# Altium PCB GP2Y_v3_eth.PcbDoc
Units mm, origin at the board's own origin, x right, y up, seen from the top; angles counter-clockwise.
Board outline 52.5 x 69.3 mm, 4 copper layers (Top Layer, Layer 2, Layer 3, Bottom Layer), stack 1.369 mm thick; 102 components, 80 nets, 370 pads, 106 vias.
Unrouted connection lines stored in the file: 21.
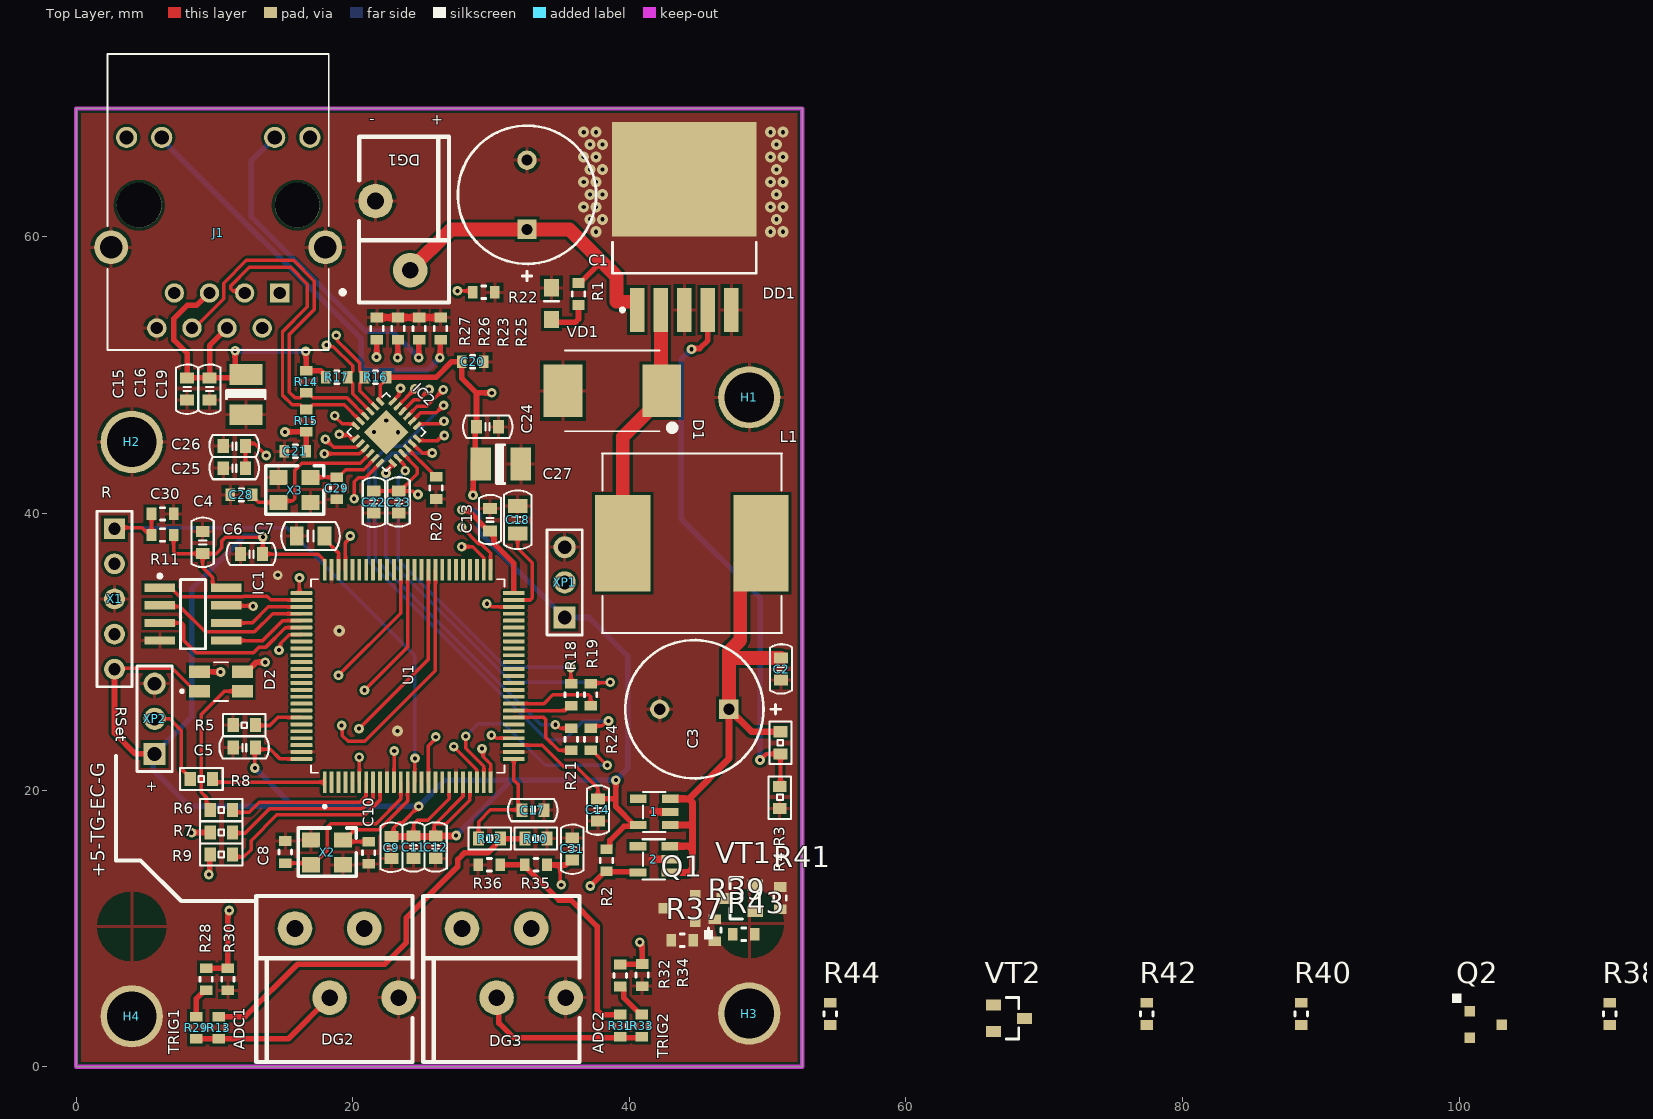
[diagram p0: Top Layer view]
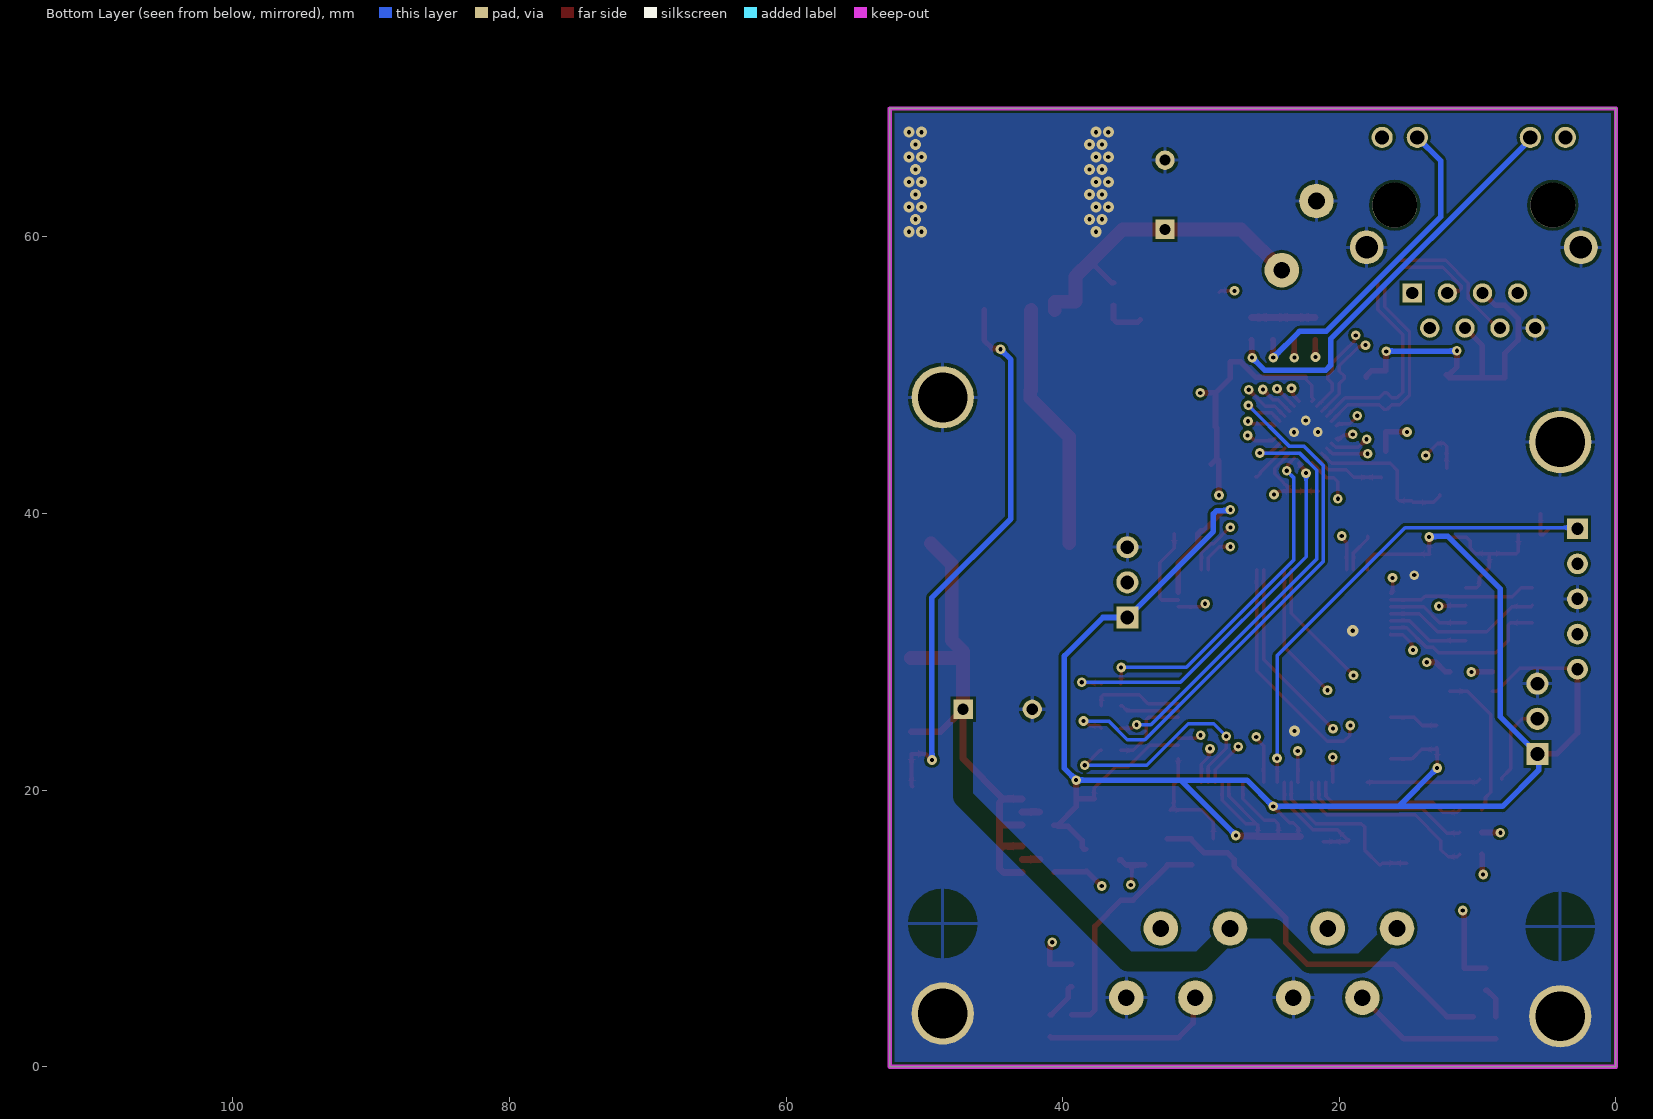
[diagram p1: Bottom Layer view, seen from below]
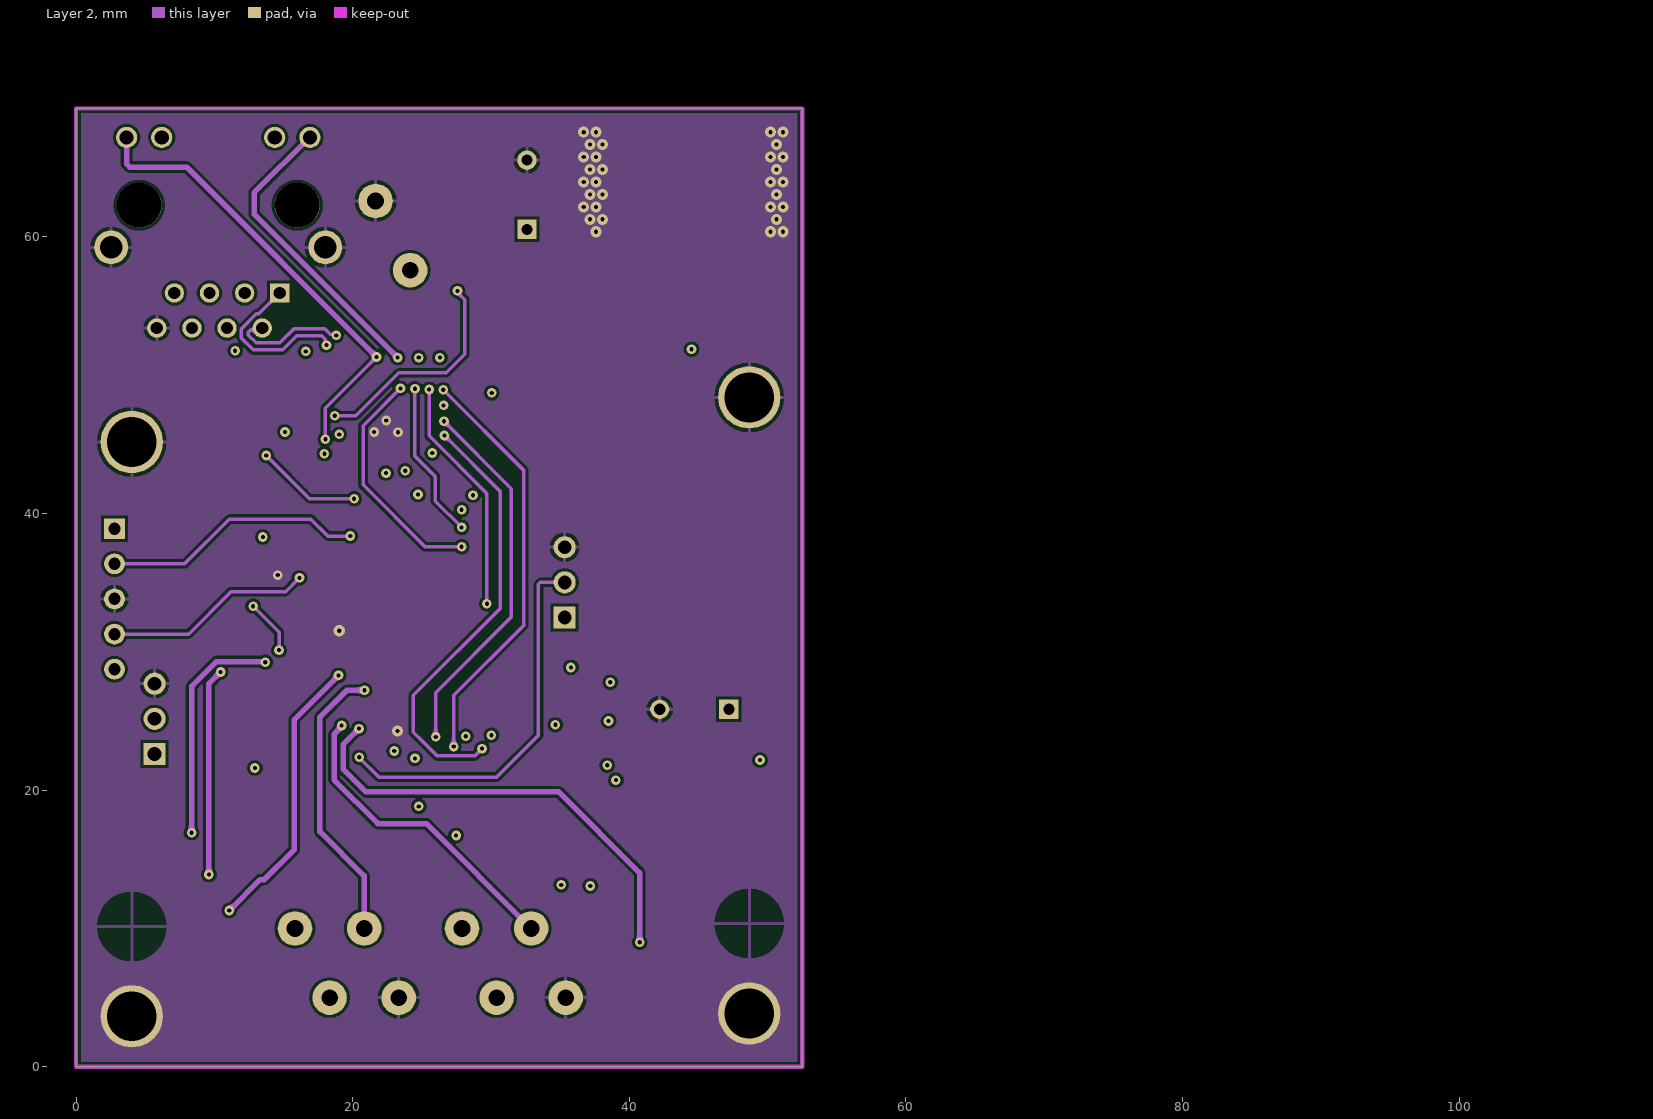
[diagram p2: Layer 2]
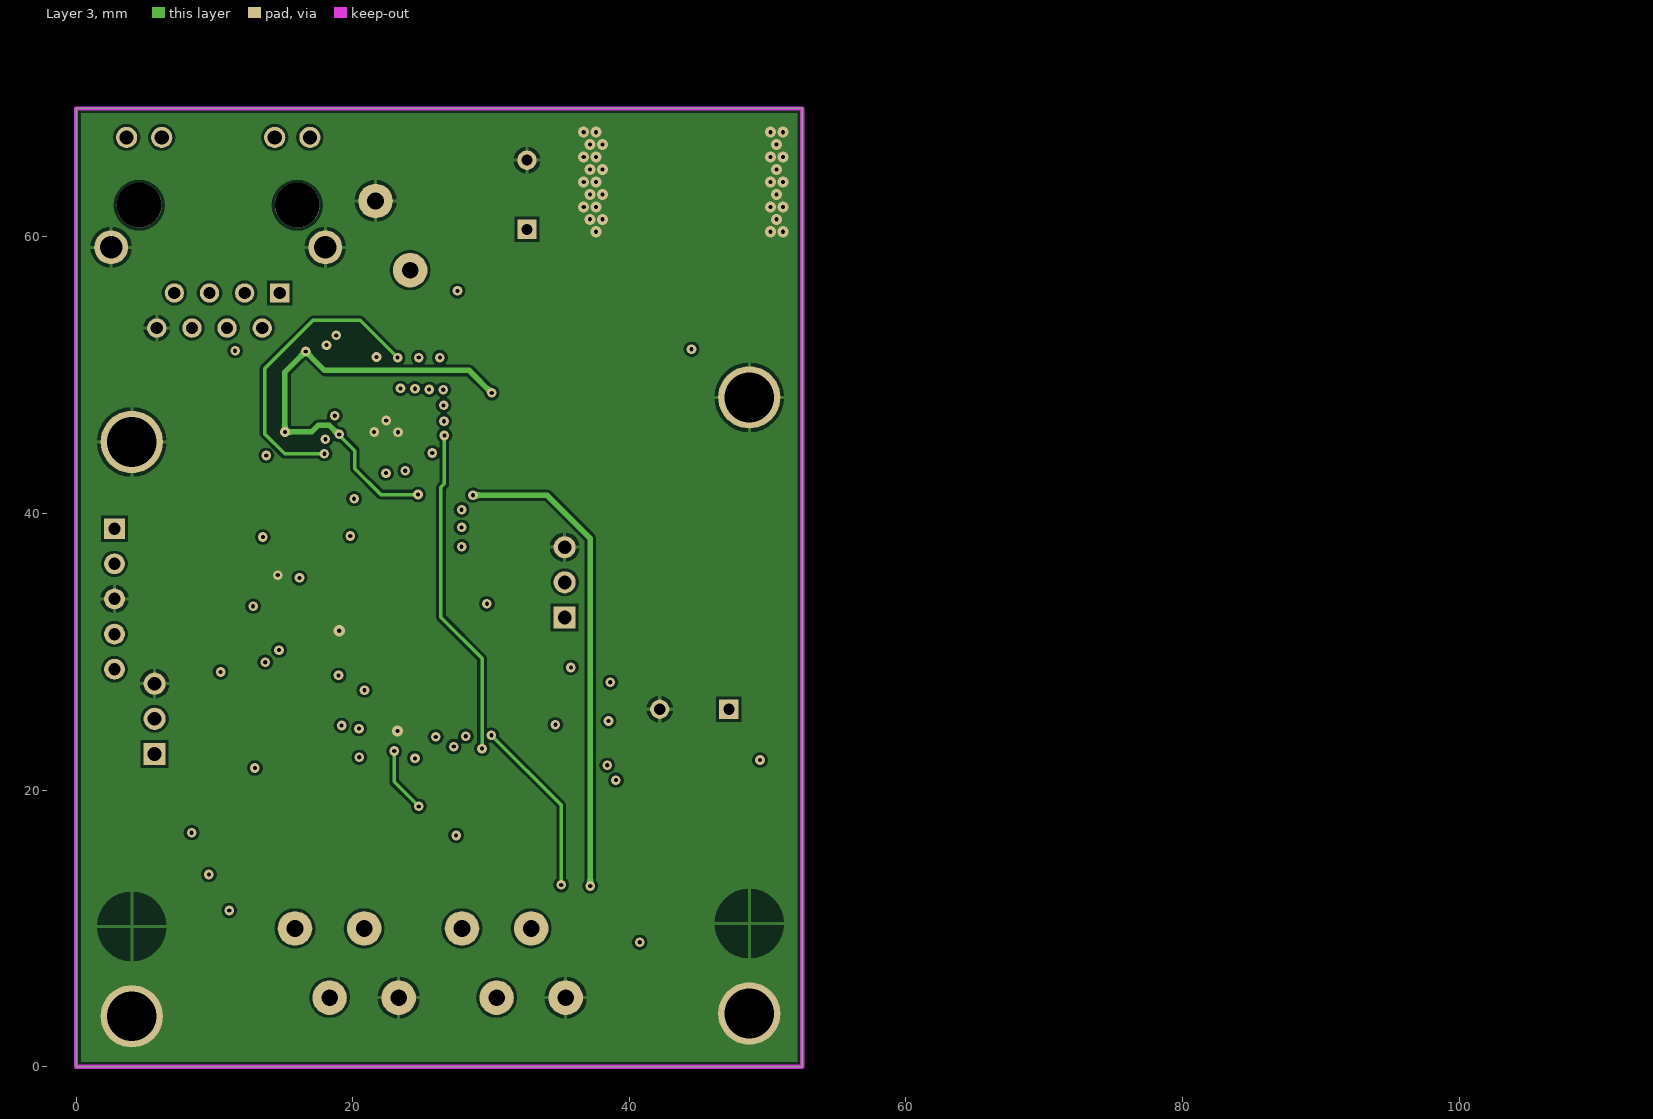
[diagram p3: Layer 3]

## Layer stack, top to bottom
Top Solder: solder mask 0.0254, SM-001, Dk 4
Top Layer: signal copper 0.035
Dielectric 1: prepreg 0.1295, PP-017, Dk 4.3
Dielectric 2: prepreg 0.1295, PP-017, Dk 4.3
Layer 2: signal copper 0.035
Dielectric 3: core 0.7112, Core-039, Dk 4.8
Layer 3: signal copper 0.035
Dielectric 4: prepreg 0.1295, PP-017, Dk 4.3
Dielectric 5: prepreg 0.1295, PP-017, Dk 4.3
Bottom Layer: signal copper 0.035
Bottom Solder: solder mask 0.0254, SM-001, Dk 4

## Board outline
0,0 0,69.3 52.5,69.3 52.5,0

## Design rules (kind name [scope] priority, off if disabled: settings)
Clearance Clearance_1 [InNetClass('ISO') vs InNet('GND')] p1: gap=1 ignorepadtopadclearanceinfootprint=FALSE
Clearance [All] p2: gap=0.2 ignorepadtopadclearanceinfootprint=FALSE
ComponentClearance [All] p1: gap=0.01 collisioncheckmode=3 verticalgap=0.01 showdistances=FALSE
DiffPairsRouting [All] p1: maxlimit=0.254 minlimit=0.2 mostfreqgap=0.254 toplayer_minwidth=0.25 toplayer_maxwidth=0.381 toplayer_prefwidth=0.381 midlayer1_minwidth=0.25 midlayer1_maxwidth=0.381 midlayer1_prefwidth=0.381 midlayer2_minwidth=0.25 midlayer2_maxwidth=0.381 midlayer2_prefwidth=0.381 bottomlayer_minwidth=0.25 bottomlayer_maxwidth=0.381 bottomlayer_prefwidth=0.381 maxuncoupledlength=12.7
HoleSize [All] p1: absolutevalues=TRUE maxlimit=5 minlimit=0.025 maxpercent=80.000 minpercent=20.000
MinimumSolderMaskSliver [All] p1: minsoldermaskwidth=0
PolygonConnect [All] p1: connectstyle=Relief reliefconductorwidth=0.254 reliefentries=4 polygonreliefangle="90 Angle" airgapwidth=0.254
RoutingVias [All] p1: holewidth=0.3 width=1 viastyle="Through Hole" minholewidth=0.3 minwidth=0 maxholewidth=1 maxwidth=4
SilkToSolderMaskClearance [IsPad] p1: minsilkscreentomaskgap=0.1 clearancetoexposedcopper=TRUE
SolderMaskExpansion [All] p1: expansion=0.102 istentingtop=FALSE
UnRoutedNet [All] p1: checkbadconnections=TRUE
Width [All] p1: maxlimit=4 minlimit=0.254 preferedwidth=0.254
24 further rules are at their usual default settings.

## Classes and differential pairs
differential pair P1_TX: +P1_TX_P -P1_TX_N
differential pair P1_RX: +P1_RX_P -P1_RX_N

## Components (designator, comment, footprint, x,y, rotation, side; value= is the part's Value field where it differs from the comment)
1 "ADP122AUJZ-3.3-R7" TSOT23-5L 41.8,18.425 r90 top
2 "ADP122AUJZ-3.3-R7" TSOT23-5L 41.775,15 r90 top
C1 "220uF 50v" "ECR 10x13mm" 32.6,63.05 r90 top value=220uF
C2 "0.1uF" "CAPACITOR 0603" 50.975,27.95 r90 top value="0603 0.1uF"
C3 "220uF 50v" "ECR 10x13mm" 44.7,25.85 r180 top value=220uF
C4 "0.1uF" "CAPACITOR 0603" 9.15,37.1 r90 top value="0603 0.1uF"
C5 "0.1uF" "CAPACITOR 0603" 12.96,23.08 r180 top value="0603 0.1uF"
C6 "0.1uF" "CAPACITOR 0603" 13.475,37.075 r180 top value="0603 0.1uF"
C7 "2.2uF" "CAPACITOR 0805" 17.95,38.375 r180 top value="0805 2.2uF"
C8 "0603 18 пФ" CAPCHIP0603 15.125,15.525 r270 top
C9 "0.1uF" "CAPACITOR 0603" 22.8,15.05 r90 top value="0603 0.1uF"
C10 "0603 18 пФ" CAPCHIP0603 21.15,15.475 r90 top
C11 "0.1uF" "CAPACITOR 0603" 24.4,15.075 r90 top value="0603 0.1uF"
C12 "0.001uF" "CAPACITOR 0603" 26,15.075 r90 top value="0603 0.1uF"
C13 "0.1uF" "CAPACITOR 0603" 29.93,38.75 r90 top value="0603 0.1uF"
C14 "0.1uF" "CAPACITOR 0603" 37.725,19.375 r270 top value="0603 0.1uF"
C15 "0.1uF" "CAPACITOR 0603" 8.025,49.812 r270 top value="0603 0.1uF"
C16 "0.1uF" "CAPACITOR 0603" 9.65,49.812 r270 top value="0603 0.1uF"
C17 "0.1uF" "CAPACITOR 0603" 33.825,18.55 r180 top value="0603 0.1uF"
C18 "2.2uF" "CAPACITOR 0805" 31.93,40.55 r270 top value="0805 2.2uF"
C19 "Cap T" "TECAP B" 12.275,48.6 r270 top value="TECAP B 10u 16V"
C20 "0603 0.1uF" CAPCHIP0603 28.675,50.975 r0 top
C21 "0603 0.1uF" CAPCHIP0603 15.85,44.5 r180 top
C22 "0.1uF" "CAPACITOR 0603" 21.525,41.625 r270 top value="0603 0.1uF"
C23 "0.1uF" "CAPACITOR 0603" 23.325,40.025 r90 top value="0603 0.1uF"
C24 "0.1uF" "CAPACITOR 0603" 28.95,46.275 r0 top value="0603 0.1uF"
C25 "0.1uF" "CAPACITOR 0603" 12.24,43.28 r180 top value="0603 0.1uF"
C26 "1uF" "CAPACITOR 0603" 12.24,44.88 r180 top value="0603 1uF"
C27 "TECAP B 10u 16V" "TECAP B" 30.7,43.575 r0 top
C28 "0603 18 пФ" CAPCHIP0603 11.95,41.35 r0 top
C29 "0603 18 пФ" CAPCHIP0603 18.85,41.825 r90 top
C30 "0603 0.1uF" CAPCHIP0603 6.25,39.975 r180 top
C31 "0.1uF" "CAPACITOR 0603" 35.875,16.55 r270 top value="0603 0.1uF"
D1 "MBRS540T3G" DIOM7958X213N 38.775,48.875 r180 top
D2 "150141M173100" LED_150141M173100 10.475,27.85 r180 top value=RGB
DD1 "LM2596S-ADJ" TO-263 43.975,60.725 r90 top
DG1 "прижимной контакт" dg250-2.5-2 26.95,67.25 r180 top
DG2 "прижимной контакт" dg250-2.5-4 13.025,0.35 r0 top
DG3 "прижимной контакт" dg250-2.5-4 25.1,0.35 r0 top
H1 "Hole" "Hole 3.5"#1 48.675,48.4 r0 top
H2 "Hole" "Hole 3.5"#1 4.025,45.175 r0 top
H3 "Hole" "Hole 3.5"#2 48.675,8.85 r0 top
H4 "Hole" "Hole 3.5"#3 4.025,15.15 r0 top
IC1 "GD25Q16CTIGR" NSO8 8.45,32.725 r0 top
IC2 "LAN8742A-CZ-TR" LAN8742A 22.435,44.112 r45 top
J1 "HR911105A" HANRUN_HR911105A 10.275,62.3 r0 top
L1 "SRR1208-6R5ML" SRR1208 44.525,37.85 r0 top
Q1 "IRLML6402" SOT23#1 44.775,10.5 r180 top
Q2 "IRLML6402" SOT23#1 100.784,4.001 r0 top
R1 "0603 10K" RESCHIP0603 36.325,55.875 r90 top
R2 "NC 0" RESCHIP0603 38.35,14.925 r270 top
R3 "0603 3K" "Resistor 0603" 50.925,22.625 r90 top
R4 "0603 1K" "Resistor 0603" 50.875,20.275 r270 top
R5 "510" "Resistor 0603" 12.96,24.705 r180 top value="0603 510R"
R6 "0603 3K" "Resistor 0603" 11.3,18.575 r180 top
R7 "0603 3K" "Resistor 0603" 11.3,16.95 r180 top
R8 "510" "Resistor 0603" 8.25,20.8 r0 top value="0603 510R"
R9 "0603 3K" "Resistor 0603" 11.3,15.35 r180 top
R10 "0603 10K" "Resistor 0603" 34.05,16.5 r180 top
R11 "0603 10K" RESCHIP0603 6.25,38.45 r180 top
R12 "0603 10K" "Resistor 0603" 29.1,16.5 r0 top
R13 "0603 0" RESCHIP0603 10.3,2.825 r270 top
R14 "0603 50R" RESCHIP0603 16.65,49.525 r90 top
R15 "0603 50R" RESCHIP0603 16.65,46.725 r270 top
R16 "0603 50R" RESCHIP0603 21.65,49.85 r0 top
R17 "0603 50R" RESCHIP0603 18.85,49.85 r180 top
R18 "0603 33R" RESCHIP0603 35.8,26.9 r90 top
R19 "0603 33R" RESCHIP0603 37.2,26.9 r90 top
R20 "0603 10K" RESCHIP0603 26.025,41.85 r90 top
R21 "0603 33R" RESCHIP0603 35.8,23.675 r90 top
R22 "0603 12.1k" RESCHIP0603 29.475,56 r0 top
R23 "0603 220 Ом" RESCHIP0603 24.8,53.375 r270 top
R24 "0603 33R" RESCHIP0603 37.2,23.675 r90 top
R25 "0603 220 Ом" RESCHIP0603 26.35,53.375 r270 top
R26 "0603 1.5K" RESCHIP0603 23.275,53.375 r270 top
R27 "0603 1.5K" RESCHIP0603 21.75,53.375 r270 top
R28 "0603 1K" RESCHIP0603 9.4,6.325 r270 top
R29 "0603 0" RESCHIP0603 8.7,2.825 r270 top
R30 "0603 2K" RESCHIP0603 10.975,6.325 r90 top
R31 "0603 0" RESCHIP0603 39.35,2.975 r270 top
R32 "0603 1K" RESCHIP0603 39.35,6.6 r270 top
R33 "0603 0" RESCHIP0603 40.9,2.975 r270 top
R34 "0603 2K" RESCHIP0603 40.925,6.625 r90 top
R35 "0603 10K" RESCHIP0603 29.875,14.6 r180 top
R36 "0603 10K" RESCHIP0603 33.25,14.6 r0 top
R37 "0603 3K" RESCHIP0603 43.825,9.15 r180 top
R38 "0603 3K" RESCHIP0603 110.884,3.826 r90 top
R39 "0603 200" RESCHIP0603 46.175,9.875 r270 top
R40 "0603 200" RESCHIP0603 88.583,3.826 r90 top
R41 "0603 1.5K" RESCHIP0603 50.9,12.2 r270 top
R42 "0603 1.5K" RESCHIP0603 77.407,3.826 r90 top
R43 "0603 10K" RESCHIP0603 48.275,9.575 r0 top
R44 "0603 10K" RESCHIP0603 54.531,3.826 r90 top
U1 "STM32F303V" QFP50P1600X1600X160-100N 23.975,28.255 r90 top value=STM32F407VE
VD1 "one color" 0805- 34.375,54.025 r90 top value=0805
VT1 "MMBT4401LT1" SOT23#2 47.975,12.175 r180 top
VT2 "MMBT4401LT1" SOT23#2 67.457,3.501 r0 top
X1 "PLS-5" PLS-5-3D 2.775,38.905 r270 top
X2 "12Mhz" XTAL_3.2_2.5 19.3,16.4 r180 top
X3 "25Mhz" XTAL_3.2_2.5 16.95,42.6 r180 top
XP1 "Battery" ZL201-3 35.325,35.025 r90 top
XP2 "reset setings" ZL201-3 5.675,25.16 r90 top

## Footprints (in the part's own frame and the unit in brackets; to place one, negate y for a bottom-side part, rotate by r counter-clockwise, add the part's x,y. Pads: shape width x height; smd on the part's side, far side on the other; paste and mask are expansions set on the pad)
0805- [mm]
  rect 1.25x1.1 smd mask+0.06: A(0,0) K(2.3,0)
  silkscreen extent 1.33,-0.5 1.33,0.5, body extent 0.12,-0.62 2.14,0.63, height 1.1
"CAPACITOR 0603" [mm]
  rect 0.8x1 smd: 1(0,0) 2(1.6,0)
  silkscreen extent -0.97,-0.8 2.6,0.8, body extent -0.01,-0.38 1.64,0.42, height 0.81
"CAPACITOR 0805" [mm]
  rect 1x1.4 smd: 1(0,0) 2(2,0)
  silkscreen extent -1.12,-1 3.12,1, body extent 0.01,-0.6 2.01,0.6, height 1.26
CAPCHIP0603 [mm] "Chip Capacitor, 2-Leads, Body 1,6x0,8mm"
  rect 0.7x0.9 smd mask+0.06: 1(-0.8,0) 2(0.8,0)
  silkscreen extent -0.15,-0.45 0.15,0.45, body extent -0.8,-0.4 0.8,0.4, height 0.9
dg250-2.5-2 [mm]
  round 2.5 hole 1.2: 1(2.8,9.65) 2(5.3,4.65)
  silkscreen extent 0,0 6.5,12
dg250-2.5-4 [mm]
  round 2.5 hole 1.2: 1(2.8,9.65) 2(5.3,4.65) 3(7.8,9.65) 4(10.3,4.65)
  silkscreen extent 0,0 11.3,12
DIOM7958X213N [mil]
  rect 110x150 smd: A(140.49,0) C(-140.49,0)
  silkscreen extent -176,-115 135,115
"ECR 10x13mm" [mm] "Rad Capacitor 50В-220мкФ"
  rect 1.4x1.4 hole 0.8 mask+0.06: 1(-2.5,0)
  round 1.4 hole 0.8 mask+0.06: 2(2.5,0)
  silkscreen extent -6.22,-5 5,5, body extent -5,-5 4.97,5, height 12.51
HANRUN_HR911105A [mm]
  rect 1.398x1.398 hole 0.89: 1(4.45,-6.35)
  round 1.398 hole 0.89: 2(3.18,-8.89) 3(1.91,-6.35) 4(0.64,-8.89) 5(-0.63,-6.35) 6(-1.9,-8.89) 7(-3.17,-6.35) 8(-4.44,-8.89)
  round 1.53 hole 1.02: 9(6.625,4.9) 10(4.085,4.9) 11(-4.085,4.9) 12(-6.625,4.9)
  round 2.445 hole 1.63: 15(7.745,-3.05) 16(-7.745,-3.05)
  round 3.25 hole 3.25 unplated: ""(-5.715,0) ""(5.715,0)
  silkscreen extent -8,-10.48 9.15,10.92
"Hole 3.5"#1 [mm]
  round 4.5 hole 3.6: 1(0,0)
"Hole 3.5"#2 [mm]
  round 4.5 hole 3.6: 1(0,-5)
"Hole 3.5"#3 [mm]
  round 4.5 hole 3.6: 1(0,-11.5)
LAN8742A [mm]
  rrect50% 0.69x0.28 smd mask+0.112: 1(-0.645,2.5) 2(-0.645,2) 3(-0.645,1.5) 4(-0.645,1) 5(-0.645,0.5) 6(-0.645,0) 13(3.145,0) 14(3.145,0.5) 15(3.145,1) 16(3.145,1.5) 17(3.145,2) 18(3.145,2.5)
  rrect50% 0.28x0.69 smd: 7(0,-0.645)
  rrect50% 0.28x0.69 smd mask+0.112: 8(0.5,-0.645) 9(1,-0.645) 10(1.5,-0.645) 11(2,-0.645) 12(2.5,-0.645) 19(2.5,3.145) 20(2,3.145) 21(1.5,3.145) 22(1,3.145) 23(0.5,3.145) 24(0,3.145)
  rect 2.286x2.286 smd: 25(1.25,1.25)
  silkscreen extent -0.75,-0.74 3.26,3.27, body extent -0.75,-0.74 3.26,3.27, height 1
LED_150141M173100 [mm]
  rect 1.5x0.9 smd: 1(1.55,0.7) 2(1.55,-0.7) 3(-1.55,0.7) 4(-1.55,-0.7)
  silkscreen extent -0.5,-1.4 2.92,1.4
NSO8 [mm] "SOIC, 8-Leads, Body 4.9x3.9mm, Pitch 1.27mm"
  rect 2.2x0.6 smd mask+0.06: 1(-2.4,1.905) 2(-2.4,0.635) 3(-2.4,-0.635) 4(-2.4,-1.905) 5(2.4,-1.905) 6(2.4,-0.635) 7(2.4,0.635) 8(2.4,1.905)
  silkscreen extent -2.52,-2.5 0.9,2.88, body extent -3,-2.45 3,2.45, height 1.7
PLS-5-3D [mm] "Connector; Header; 5 Position"
  rect 1.5x1.5 hole 0.9: 1(0,0)
  round 1.5 hole 0.9: 2(2.54,0) 3(5.08,0) 4(7.62,0) 5(10.16,0)
  silkscreen extent -1.27,-1.27 11.43,1.27, body extent -1.27,-1.27 11.43,1.27, height 8.44
QFP50P1600X1600X160-100N [mm]
  rrect25% 1.56x0.28 smd mask+0.112: 1(-7.68,6) 2(-7.68,5.5) 3(-7.68,5) 4(-7.68,4.5) 5(-7.68,4) 6(-7.68,3.5) 7(-7.68,3) 8(-7.68,2.5) 9(-7.68,2) 10(-7.68,1.5) 11(-7.68,1) 12(-7.68,0.5) 13(-7.68,0) 14(-7.68,-0.5) 15(-7.68,-1) 16(-7.68,-1.5) 17(-7.68,-2) 18(-7.68,-2.5) 19(-7.68,-3) 20(-7.68,-3.5) 21(-7.68,-4) 22(-7.68,-4.5) 23(-7.68,-5) 24(-7.68,-5.5) 25(-7.68,-6) 51(7.68,-6) 52(7.68,-5.5) 53(7.68,-5) 54(7.68,-4.5) 55(7.68,-4) 56(7.68,-3.5) 57(7.68,-3) 58(7.68,-2.5) 59(7.68,-2) 60(7.68,-1.5) 61(7.68,-1) 62(7.68,-0.5) 63(7.68,0) 64(7.68,0.5) 65(7.68,1) 66(7.68,1.5) 67(7.68,2) 68(7.68,2.5) 69(7.68,3) 70(7.68,3.5) 71(7.68,4) 72(7.68,4.5) 73(7.68,5) 74(7.68,5.5) 75(7.68,6)
  rrect25% 0.28x1.56 smd mask+0.112: 26(-6,-7.68) 27(-5.5,-7.68) 28(-5,-7.68) 29(-4.5,-7.68) 30(-4,-7.68) 31(-3.5,-7.68) 32(-3,-7.68) 33(-2.5,-7.68) 34(-2,-7.68) 35(-1.5,-7.68) 36(-1,-7.68) 37(-0.5,-7.68) 38(0,-7.68) 39(0.5,-7.68) 40(1,-7.68) 41(1.5,-7.68) 42(2,-7.68) 43(2.5,-7.68) 44(3,-7.68) 45(3.5,-7.68) 46(4,-7.68) 47(4.5,-7.68) 48(5,-7.68) 49(5.5,-7.68) 50(6,-7.68) 76(6,7.68) 77(5.5,7.68) 78(5,7.68) 79(4.5,7.68) 80(4,7.68) 81(3.5,7.68) 82(3,7.68) 83(2.5,7.68) 84(2,7.68) 85(1.5,7.68) 86(1,7.68) 87(0.5,7.68) 88(0,7.68) 89(-0.5,7.68) 90(-1,7.68) 91(-1.5,7.68) 92(-2,7.68) 93(-2.5,7.68) 94(-3,7.68) 95(-3.5,7.68) 96(-4,7.68) 97(-4.5,7.68) 98(-5,7.68) 99(-5.5,7.68) 100(-6,7.68)
  silkscreen extent -9.54,-7 7,7
RESCHIP0603 [mm] "Chip Resistor, 2-Leads, Body 1,6x0,8mm"
  rect 0.7x0.9 smd mask+0.06: 1(-0.8,0) 2(0.8,0)
  silkscreen extent -0.15,-0.45 0.15,0.45, body extent -0.8,-0.4 0.8,0.4, height 0.4
"Resistor 0603" [mm]
  rect 0.8x1 smd: 1(0,0) 2(1.6,0)
  silkscreen extent -0.72,-0.8 2.35,0.8, body extent -0.03,-0.45 1.63,0.45, height 0.46
SOT23#1 [mil]
  rect 30x30 smd: 1(0,0) 2(0,-75) 3(90,-37.5)
  silkscreen extent -50,25 -25,50, body extent -4,-97 94,21, height 41
SOT23#2 [mil] "SOT23, 3-Leads, Body 2.9x1.3mm, Pitch 0.95mm"
  rect 43.31x31.5 smd mask+2.36: 1(-44.29,37.4) 2(-44.29,-37.4) 3(44.29,0)
  silkscreen extent -8,-59 28,59, body extent -52,-59 52,59, height 43
SRR1208 [mm]
  rect 4x7 smd: P$1(-5,0) P$2(5,0)
  silkscreen extent -6.5,-6.5 6.5,6.5
"TECAP B" [mm] "Chip Capacitor, 2-Leads, Body 3,5x2,8mm"
  rect 1.5x2.4 smd mask+0.06: 1(-1.45,0) 2(1.45,0)
  silkscreen extent -0.3,-1.4 0.3,1.4, body extent -1.75,-1.4 1.75,1.4, height 1.92
TO-263 [mm] "D2-PAK, 6-Leads, Body 8.6x10.2mm, Pitch 1.7mm, Lead Span 14.1mm"
  rect 3.2x1.05 smd mask+0.06: 1(-6,3.4) 2(-6,1.7) 3(-6,0) 4(-6,-1.7) 5(-6,-3.4)
  rect 8.3x10.45 smd mask+0.06: 6(3.45,0)
  silkscreen extent -6.12,-5.2 -1.1,5.2, body extent -7.18,-5.08 7.46,5.08, height 4.57
TSOT23-5L [mm]
  rect 0.6x1.2 smd mask+0.07: 1(-0.95,-1.15) 2(0,-1.15) 3(0.95,-1.15) 4(0.95,1.15) 5(-0.95,1.15)
  silkscreen extent -1.45,-0.81 1.45,0.82, body extent -1.45,-1.4 1.45,1.4, height 1
XTAL_3.2_2.5 [mm]
  rect 1.3x1.1 smd: 1(0,0) 2(2.3,0) 3(2.3,1.8) 4(0,1.8)
  silkscreen extent -0.94,-0.86 3.25,2.64, body extent -0.46,-0.34 2.74,2.16, height 0.82
ZL201-3 [mm] "Connector; PLS-3; pitch 2.54"
  rect 1.6x1.6 hole 1 mask+0.06: 1(-2.54,0)
  round 1.6 hole 1 mask+0.06: 2(0,0) 3(2.54,0)
  silkscreen extent -3.81,-1.27 3.81,1.27, body extent -3.81,-1.27 3.81,1.27, height 8.44

## Part data
1 2: "Linear Voltage Regulator IC 1 Output 300mA TSOT-5", Package="TSOT-5 Analog Devices", Availability=Unavailable, MF="Analog Devices", MP=ADP122AUJZ-3.3-R7, Price=None, SnapEDA_Link=https://www.snapeda.com/parts/ADP122AUJZ-3.3-R7/Analog%20Devices%20Inc./view-part/231148/?ref=snap
C1 C3: library part "Cap Pol", "Polarized Capacitor (Rad)", Voltage=50, Type=Type, URL=http://www.hitano.com.tw/PDF/ECR_081225.pdf
C2 C4 C5 C6 C7 C9 C11 C12 C13 C14 C15 C16 C17 C18 C22 C23 C24 C25 C26 C31: library part Capasitor
C8 C10 C20 C21 C28 C29 C30: library part "Cap C", "Керамическтй конденсатор SMD C0603", Type=0603
C19: "Solid Tantalum Surface Mount Capacitors", Voltage=6v, Type=Type
C27: library part "Cap T", "Solid Tantalum Surface Mount Capacitors", Voltage=16V, Type="TECAP B"
D1: "Diode Schottky 40V 5A Surface Mount SMC", Package="DO-214 ON Semiconductor", Availability=Unavailable, MF="ON Semiconductor", MP=MBRS540T3G, Price=None, SnapEDA_Link=https://www.snapeda.com/parts/MBRS540T3G/ON%20Semiconductor/view-part/78777/?ref=snap
D2: "Red, Green, Blue _RGB_ 625nm Red, 520nm Green, 470nm Blue LED Indication - Discrete 2V Red, 3.2V Green, 3.2V Blue 1411 _3528 Metric_", Package="1411 WÃ¼rth Elektronik", Availability=Unavailable, MF="Wurth Electronics", MP=150141M173100, Price=None, SnapEDA_Link=https://www.snapeda.com/parts/150141M173100/Wurth%20Electronics%20Inc./view-part/281733/?ref=snap
DD1: "SIMPLE SWITCHER® Power Converter 150 KHz 3A Step-Down Voltage Regulator, 5-pin TO-263", Manufacturer="National Semiconductor", ComponentLink1URL=http://www.national.com/ds/LM/LM2596.pdf, ComponentLink2URL=http://www.national.com/pf/LM/LM2596.html, ComponentLink3URL=http://www.national.com/packaging/folders/ts5b.html, CompType=Switcher, PartNumber=LM2596S-ADJ, Published=13.04.2012, Publisher="Reukov A.V."
DG1: library part dg250-2.5-2
DG2 DG3: library part dg250-2.5-4
IC1: library part W25Q128FVEIG, "128M-bit Serial Flash Memory with uniform 4KB sectors and Dual/Quad SPI and QPI"
J1: "HR911105A Ethernet Interface Arduino Platform Evaluation Expansion Board", Package=None, Availability=Unavailable, MF=DFRobot, MP=HR911105A, Price=None, SnapEDA_Link=https://www.snapeda.com/parts/HR911105A/DFRobot/view-part/214807/?ref=snap
L1: "6.5ÂµH Shielded Wirewound Inductor 6A 18mOhm Max Nonstandard", Package="Nonstandard Bourns", Availability=Unavailable, MF=Bourns, MP=SRR1208-6R5ML, Price=None, SnapEDA_Link=https://www.snapeda.com/parts/SRR1208-6R5ML/Bourns/view-part/353452/?ref=snap
Q1 Q2: library part P-ch_SOT23, "20V P-Channel Enhancement Mode MOSFET", ComponentLink1Description="Manufacturer Link", ComponentLink1URL=http://www.zetex.com/, ComponentLink2Description=Datasheet, ComponentLink2URL=www.zetex.com/3.0/pdf/ZXM61P02F.pdf, DatasheetVersion=Jul-99, PackageDescription="SOT-23; 3 Leads; Body 3.1 x 2.5 mm, inc. leads (LxW max), Alternate Lead Configuration", PackageReference=SOT23, PackageVersion=1996, Published=17-Dec-2003, Publisher="Altium Limited"
R1 R2 R11 R13 R14 R15 R16 R17 R18 R19 R20 R21 R22 R24 R26 R27 R28 R29 R30 R31 R32 R33 R34 R35 R36 R37 R38 R39 R40 R41 R42 R43 R44: library part Res, "Резистор", Power_W={Power_W}, Tolerance_Percent={Tolerance_Percent}, Body={Body}, Class="Электронные компоненты", Installation={Installation}, Ordering_Information={Ordering_Information}, Pins=2, SubClass=Резисторы
R3 R4 R5 R6 R7 R8 R9 R10 R12: library part Resistor
R23 R25: library part Res, "Резистор SMD R0603", Tolerance=%, PWR=Value, Type=0603
U1: "ARMÂ® CortexÂ®-M4 STM32F3 Microcontroller IC 32-Bit 72MHz 100-LQFP (14x14)", Package="LQFP-100 STMicroelectronics", Availability=Unavailable, MF=STMicroelectronics, MP=STM32F303V, Price=None
VD1: library part "LED SMD", Color={Color}, Body={Body}, Class="Электронные компоненты", Diameter_mm={Diameter_mm}, Installation={Installation}, Luminous_intensity_mcd={Luminous_intensity_mcd}, Ordering_Information={Ordering_Information}, Pins=2, Pitch_mm={Pitch_mm}, SubClass=Светодиоды
VT1 VT2: library part BC846, "NPN Bipolar Transistor", Published=17.04.2012, Publisher="Reukov A.V."
X1: "Header, 5-Pin", LatestRevisionDate=17-Jul-2002, LatestRevisionNote="Re-released for DXP Platform.", Publisher="Altium Limited"
X2 X3: library part "XTAL 2-pin"
XP1: library part "Select jump", Class="Электронные компоненты", Installation=DIP, Ordering_Information={Ordering_Information}, Pins=3, Pitch_mm={Pitch_mm}, SubClass=Разъемы, Type_of_connector={Type_of_connector}
XP2: library part "Select jump", "Ter120", Class="Электронные компоненты", Installation=DIP, Ordering_Information={Ordering_Information}, Pins=3, Pitch_mm={Pitch_mm}, SubClass=Разъемы, Type_of_connector={Type_of_connector}

## Via types
v1: diameter 0.7, hole 0.3, Top Layer to Bottom Layer, tented both sides, 73 vias
v2: diameter 0.8, hole 0.3, Top Layer to Bottom Layer, tented both sides, 33 vias

## Nets (pads, with @x,y where several pads share a name; then routed paths per layer and width w, separated by ;. In a path a pad name is that pad's centre, name@x,y a point inside that pad or via, vN(x,y) a via of type N, cw(c..) or ccw(c..) an arc to the next point about the centre after c; other vN are vias at no path point)
+3.3v: 1.5 C4.1 C5.1 C6.1 C9.2 C11.2 C12.2 C13.1 C14.1 D2.1 IC1.8 R2.1 R11.1 U1.11 U1.19 U1.21 U1.22 U1.28 U1.50 U1.75 U1.100 X1.5 XP1.1 XP2.1 | length 185.3
  Top Layer w0.254: X1.5 2.857,28.827 6.948,28.827 8.625,27.15 D2.1 ; R11.1 7.05,37.25 7.2,37.1 C4.1 ; IC1.8 10.05,34.63 9.877,34.803 9.877,35.373 9.15,36.1 C4.1 ; v1(12.925,21.6) 12.925,23.045 C5.1 13.09,22.95 14.05,22.95 14.745,22.255 U1.100 ; U1.75 17.962,35.948 17.962,36.588 17.675,36.875 17.475,37.075 C6.1 13.5,37.1 v1(13.5,38.303) 10.828,38.303 10.543,38.018 10.543,37.518 10.3,37.275 10.125,37.1 C4.1 ; C9.2 22.813,16.663 22.957,16.807 22.957,17.282 23.325,17.65 23.6,17.65 v1(24.775,18.825) ; U1.11 22.988,20.587 22.988,22.813 v1(23,22.825) ; C11.2 24.4,17.55 24.675,17.825 25.425,17.825 26.975,19.375 U1.19 ; C12.2 25.881,16.794 25.881,17.456 26,17.575 ; U1.21 27.975,19.55 26,17.575 ; U1.22 28.475,19.275 26.775,17.575 26,17.575 ; U1.28 33.708,23.255 35.257,21.705 36.175,21.705 37.725,20.156 C14.1
  Top Layer w0.4: X1.5 2.775,24.12 4.275,22.62 XP2.1 ; v1(27.875,40.275) 27.932,40.218 28.362,40.218 29.83,38.75 C13.1 30.03,38.75 30.23,38.55 30.23,37.82 31.655,36.395 U1.50@31.655,34.315 ; C14.1 38.85,19.375 39.025,19.55 ; R2.1 38.45,15.725 38.6,15.875 38.6,16.375 39.6,17.375 1.5@40.35,17.375 ; v1(39.025,20.725) 39.025,19.55 ; 1.5 40.35,17.475 39.025,18.8 39.025,19.375 39.025,19.55
  Top Layer w0.5: C9.2@22.813,16.663 C12.2@25.987,16.663 ; C12.2 26.025,16.7 27.45,16.7 v1(27.475,16.725)
  Layer 3 w0.254: v1(23,22.825) 23,20.6 v1(24.775,18.825)
  Bottom Layer w0.4: v1(12.925,21.6) 15.7,18.825 ; v1(13.5,38.303) 13.453,38.35 12.15,38.35 8.35,34.55 8.35,25.295 XP2.1 5.575,22.52 5.575,21.45 8.2,18.825 15.7,18.825 ; v1(27.475,16.725) 31.475,20.725 ; v1(27.875,40.275) 27.932,40.218 28.866,40.218 29.1,39.983 29.1,38.71 XP1.1 37.09,32.485 39.875,29.7 39.875,21.575 v1(39.025,20.725) 31.475,20.725 ; 15.7,18.825 v1(24.775,18.825) 26.675,20.725 31.475,20.725
+3.3v_E: 2.5 C15.1 C16.1 C19.1 C20.1 C21.1 C22.1 C23.2 C24.1 C27.1 IC2.1 IC2.9 IC2.19 J1.4 J1.5 R2.2 R14.2 R15.2 R16.2 R17.2 | length 130.7
  Top Layer w0.254: v1(19.025,45.723) 19.049,45.723 19.11,45.662 19.712,45.662 20.071,45.303 20.09,45.303 IC2.1 ; C22.1 C23.2 C23.2@23.425,41.625 ; IC2.19 21.834,48.248 21.834,48.267 21.979,48.412 21.979,49.279 22.45,49.75 R16.2 ; IC2.9 24.675,43.286 24.675,42.875 C23.2@23.425,41.625 ; v1(24.725,41.375) 24.604,41.375 24.354,41.625 C23.2@23.425,41.625
  Top Layer w0.4: J1.5 9.599,55.95 8.703,55.055 8.029,55.055 7.075,54.1 7.075,52.55 8.025,51.6 C15.1 C16.1 ; J1.4 9.65,52.145 C16.1 ; v1(11.5,51.775) 11.5,50.6 12.05,50.05 C19.1 12.037,49.812 C16.1 ; v1(15.1,45.9) 15.112,45.912 16.638,45.912 R15.2 C21.1 ; v1(16.6,51.725) 16.625,51.7 16.625,50.35 R14.2 17.675,50.325 18.05,49.95 R17.2 ; R16.2 26.006,49.85 27.131,50.975 C20.1 27.875,49.8 28.95,48.725 ; v1(28.7,41.325) 28.7,43.825 28.85,43.975 C27.1@28.875,43.95 ; C27.1 C27.1@28.875,43.95 ; v1(30.05,48.725) 28.95,48.725 ; v1(37.175,13.075) 37.2,13.075 38.25,14.125 R2.2 38.387,14.088 40.587,14.088 2.5 ; C27.1@28.875,43.95 28.875,46.2 C24.1 28.95,48.725
  Layer 3 w0.254: v1(19.025,45.723) 19.025,45.675 20.15,44.55 20.15,43.25 22.025,41.375 v1(24.725,41.375)
  Layer 3 w0.4: v1(19.025,45.723) 18.968,45.723 18.316,46.375 17.5,46.375 17.025,45.9 v1(15.1,45.9) 15.1,50.225 v1(16.6,51.725) 17.975,50.35 28.425,50.35 v1(30.05,48.725) ; v1(28.7,41.325) 34.05,41.325 37.175,38.2 v1(37.175,13.075)
  Bottom Layer w0.4: v1(11.5,51.775) 11.525,51.75 16.575,51.75 v1(16.6,51.725)
+5v: 1.1 1.3 2.1 2.3 C2.2 C3.1 L1.P$2 Q1.3 Q2.3 R3.2 R37.2 R38.2 | length 40.7
  Top Layer w0.5: 2.1 44.275,14.05 44.568,14.343 44.568,15.657 ; 2.3 44.275,15.95 44.568,15.657 ; 1.1 44.475,17.475 44.568,17.382 ; 1.3 44.3,19.375 ; R3.2 48.825,24.225 C3.1 47.2,22.275 44.3,19.375 ; 44.3,19.375 44.568,19.107 44.568,17.382 ; 44.568,15.657 44.568,17.382
  Top Layer w1: C3.1 47.2,30.037 ; L1.P$2 48.025,36.35 48.025,30.863 47.2,30.037 ; C2.2 47.687,29.55 47.2,30.037
ADC1: R10.2 R12.2 R13.1 | length 28.9
  Top Layer w0.4: R13.1 12.225,3.625 16.025,7.425 22.325,7.425 23.875,8.975 23.875,10.775 27.6,14.5 27.6,15 28.075,15.475 29.775,15.475 30.7,16.4 R12.2 R10.2
ADC2: R31.1 R35.1 R36.1 | length 16.8
  Top Layer w0.4: R35.1 R36.1 32.45,14.5 34.9,12.05 35.775,12.05 37.675,10.15 37.675,4.1 38,3.775 R31.1
ECO1: DG2.3 U1.63 | length 30.6
  Top Layer w0.254: v1(20.85,27.225) 23.975,30.35 U1.63
  Layer 2 w0.4: DG2.3 20.825,13.8 17.625,17 17.625,25.275 19.575,27.225 v1(20.85,27.225)
ECO2: DG3.3 U1.59 | length 39.9
  Top Layer w0.254: v1(19.2,24.675) 19.256,24.619 19.256,23.944 19.67,23.53 20.88,23.53 25.975,28.625 U1.59
  Layer 2 w0.4: v1(19.2,24.675) 19.2,24.594 18.65,24.044 18.65,20.75 21.825,17.575 25.325,17.575 DG3.3
Eth_NRST: IC2.15 U1.23 | length 37
  Top Layer w0.254: IC2.15 24.669,47.761 25.361,47.761 v1(26.55,48.95) ; v1(27.3,23.15) 28.962,21.488 28.962,20.588 U1.23
  Layer 2 w0.254: v1(26.55,48.95) 32.35,43.15 32.35,31.9 27.3,26.85 v1(27.3,23.15)
GND: 1.2 2.2 C1.2 C2.1 C3.2 C4.2 C5.2 C6.2 C7.2 C8.1 C9.1 C10.1 C11.1 C12.1 C13.2 C14.2 C15.2 C16.2 C17.1 C18.1 C19.2 C20.2 C21.2 C22.2 C23.1 C24.2 C25.2 C26.2 C27.2 C28.1 C29.1 C30.1 C31.1 D1.A DD1.3 DD1.5 DD1.6 DG1.2 DG2.4 DG3.4 H1.1 H2.1 H3.1 H4.1 IC1.4 IC2.25 J1.8 J1.15 J1.16 R4.2 R5.2 R10.1 R20.1 R22.2 R23.1 R25.1 R26.1 R27.1 R30.1 R34.1 R35.2 R43.1 R44.1 U1.10 U1.20 U1.27 U1.74 U1.99 VD1.K VT1.2 VT2.2 X1.3 X2.2 X2.4 X3.2 X3.4 XP1.3 XP2.3 | length 7.1
  Top Layer w0.5: R27.1 R26.1 R23.1 R25.1 ; 41.65,15 2.2 ; 41.675,18.425 1.2
  other v1: 14.575,35.55 23.275,45.875 21.55,45.9 22.425,46.725
  other v2: 23.225,24.275 19.025,31.525 37.6,60.375 50.2,60.375 51.1,60.375 37.15,61.275 38.05,61.275 50.65,61.275 36.7,62.175 37.6,62.175 50.2,62.175 51.1,62.175 37.15,63.075 38.05,63.075 50.65,63.075 36.7,63.975 37.6,63.975 50.2,63.975 51.1,63.975 37.15,64.875 38.05,64.875 50.65,64.875 36.7,65.775 37.6,65.775 50.2,65.775 51.1,65.775 37.15,66.675 38.05,66.675 50.65,66.675 36.7,67.575 37.6,67.575 50.2,67.575 51.1,67.575
NetC7_1: C7.1 U1.73 | length 2.9
  Top Layer w0.254: C7.1 17.95,38.175 18.975,37.15 U1.73
NetC8_2: C8.2 U1.12 X2.3 | length 12.6
  Top Layer w0.254: C8.2 16.875,14.725 X2.3 17.1,14.6 18.175,15.675 18.175,17.35 18.4,17.575 21.691,17.575 23.475,19.359 U1.12
NetC10_2: C10.2 U1.13 X2.1 | length 9.1
  Top Layer w0.254: C10.2 19.425,16.275 X2.1 19.4,16.4 20.121,17.121 21.879,17.121 23.975,19.217 U1.13
NetC17_2: C17.2 R12.1 U1.26 | length 8.6
  Top Layer w0.254: R12.1 29.1,17.725 29.95,18.575 C17.2@32.2,18.575 ; U1.26 31.655,20.731 31.952,20.434 31.952,18.823 C17.2@32.2,18.575 ; C17.2 C17.2@32.2,18.575
NetC18_2: C18.2 U1.49 | length 6.5
  Top Layer w0.254: U1.49 31.66,33.75 32.826,33.75 32.975,33.899 32.975,36.45 31.93,37.495 C18.2
NetC25_1: C25.1 C26.1 IC2.6 | length 14.9
  Top Layer w0.254: C25.1 12.24,44.08 12.24,44.2 C26.1 12.438,45.078 12.872,45.078 v1(13.75,44.2) ; v1(20.1,41.075) 20.1,42.3 20.4,42.6 20.923,42.6 IC2.6
  Layer 2 w0.254: v1(13.75,44.2) 16.875,41.075 v1(20.1,41.075)
NetC28_2: C28.2 IC2.4 X3.3 | length 11.5
  Top Layer w0.254: C28.2 12.75,41.25 13.2,40.8 X3.3 14.769,40.919 15.651,40.919 15.8,41.068 15.8,43.112 16.313,43.625 20.533,43.625 IC2.4
NetC29_2: C29.2 IC2.5 X3.1 | length 5.3
  Top Layer w0.254: X3.1 16.975,42.625 18.95,42.625 19.496,43.171 20.787,43.171 IC2.5
NetC31_2: C31.2 R36.2 U1.29 | length 18.1
  Top Layer w0.254: v1(30.027,23.975) 30.148,23.975 30.368,23.755 U1.29 ; 35,14.6 35,13.225 v1(35.075,13.15)
  Top Layer w0.4: R36.2 35,14.6 35.425,14.6 35.775,14.95 C31.2
  Layer 3 w0.254: v1(30.027,23.975) 35.075,18.927 v1(35.075,13.15)
NetD1_C: D1.C DD1.2 L1.P$1 | length 18.1
  Top Layer w1: L1.P$1 39.525,45.549 42.343,48.367 D1.C 42.3,48.918 42.3,54.7 DD1.2
NetD2_2: D2.2 R9.2 | length 18
  Top Layer w0.4: D2.2 v1(10.45,28.55) ; v1(9.6,13.9) 9.65,13.95 9.65,15.3 R9.2
  Layer 2 w0.4: v1(9.6,13.9) 9.6,27.7 v1(10.45,28.55)
NetD2_3: D2.3 R6.2 | length 10.8
  Top Layer w0.254: R6.2 9.427,18.848 9.427,19.473 9.05,19.85 9.05,25.475 10.725,27.15 D2.3
NetD2_4: D2.4 R7.2 | length 20
  Top Layer w0.4: v1(8.35,16.925) 8.362,16.937 9.688,16.937 R7.2 ; D2.4 12.325,28.55 13.025,29.25 v1(13.675,29.25)
  Layer 2 w0.4: v1(8.35,16.925) 8.35,27.511 10.139,29.3 13.625,29.3 v1(13.675,29.25)
NetDD1_4: DD1.4 R3.1 R4.1 | length 40
  Top Layer w0.3: v1(49.45,22.175) 49.9,22.625 R3.1 50.925,20.325 R4.1
  Top Layer w0.4: v1(44.5,51.875) 44.557,51.932 45.082,51.932 45.675,52.525 DD1.4
  Bottom Layer w0.4: v1(44.5,51.875) 43.75,51.125 43.75,39.625 49.45,33.925 v1(49.45,22.175)
NetDG2_1: DG2.1 Q2.2
NetDG2_2: DG2.2 R13.2 R29.2 | length 10.9
  Top Layer w0.4: R29.2 R13.2 15.35,2.025 DG2.2
NetDG3_1: DG3.1 Q1.2
NetDG3_2: DG3.2 R31.2 R33.2 | length 12.7
  Top Layer w0.4: DG3.2 30.575,4.825 30.575,3.15 31.625,2.1 40.825,2.1 R33.2
NetIC1_1: IC1.1 U1.77 | length 10.6
  Top Layer w0.254: IC1.1 6.85,34.63 7.493,33.987 12.069,33.987 12.107,34.025 13.8,34.025 14.07,33.755 U1.77
NetIC1_2: IC1.2 U1.79 | length 11.6
  Top Layer w0.254: IC1.2 6.135,33.275 7.5,33.275 9.328,31.447 12.897,31.447 14.205,32.755 U1.79
NetIC1_3: IC1.3 U1.81 | length 12.6
  Top Layer w0.254: IC1.3 7.626,32.09 7.775,31.941 7.775,30.825 8.675,29.925 12.825,29.925 13.25,30.35 13.725,30.35 15.13,31.755 U1.81
NetIC1_5: IC1.5 U1.80 | length 6
  Top Layer w0.254: IC1.5 13.489,30.82 14.924,32.255 U1.80
NetIC1_6: IC1.6 U1.78 | length 5.9
  Top Layer w0.254: IC1.6 12.74,32.09 13.905,33.255 U1.78
NetIC1_7: IC1.7 U1.82 | length 8.2
  Top Layer w0.254: IC1.7 10.88,33.33 12.77,33.33 v1(12.8,33.3) ; v1(14.675,30.125) 14.76,30.21 14.76,30.582 15.42,31.242 16.282,31.242 U1.82
  Layer 2 w0.254: v1(12.8,33.3) 14.675,31.425 v1(14.675,30.125)
NetIC2_2: IC2.2 J1.12 R27.2 | length 37.4
  Top Layer w0.254: v1(18.025,45.375) 18.617,44.783 20.259,44.783 20.546,45.07 IC2.2
  Top Layer w0.4: v1(21.725,51.325) 21.737,51.337 21.737,52.563 R27.2
  Layer 2 w0.254: v1(18.025,45.375) 18.025,47.625 v1(21.725,51.325)
  Layer 2 w0.4: J1.12 3.65,65.284 3.884,65.05 8,65.05 v1(21.725,51.325)
NetIC2_3: IC2.3 J1.9 R26.2 | length 48.2
  Top Layer w0.254: v1(17.95,44.325) 20.508,44.325 20.899,44.717 IC2.3
  Top Layer w0.4: v1(23.25,51.275) 23.262,51.287 23.262,52.563 R26.2
  Layer 2 w0.4: J1.9 16.875,67.2 12.875,63.2 12.875,61.65 v1(23.25,51.275)
  Layer 3 w0.254: v1(17.95,44.325) 15.075,44.325 13.625,45.775 13.625,50.475 17.125,53.975 20.55,53.975 v1(23.25,51.275)
NetIC2_7: IC2.7 R19.2 | length 28.5
  Top Layer w0.254: v1(22.4,42.925) 22.4,43.045 22.942,43.587 22.942,43.605 IC2.7 ; R19.2 37.25,27.75 38.575,27.75 v1(38.625,27.8)
  Bottom Layer w0.254: v1(22.4,42.925) 22.4,36.883 31.483,27.8 v1(38.625,27.8)
NetIC2_8: IC2.8 R18.2 | length 24.7
  Top Layer w0.254: IC2.8 23.244,43.991 23.715,43.521 23.715,43.185 v1(23.8,43.1) ; v1(35.775,28.875) 35.775,27.725 R18.2
  Bottom Layer w0.254: v1(23.8,43.1) 23.275,42.575 23.275,36.65 31.05,28.875 v1(35.775,28.875)
NetIC2_10: IC2.10 R20.2 | length 3
  Top Layer w0.254: IC2.10 25.702,42.966 25.702,42.873 25.925,42.65 R20.2
NetIC2_11: IC2.11 R21.2 | length 32
  Top Layer w0.254: IC2.11 24.323,45.07 25.018,44.375 v1(25.75,44.375) ; v1(34.65,24.725) 34.755,24.725 35.005,24.475 R21.2
  Bottom Layer w0.254: v1(25.75,44.375) 22.875,44.375 21.629,43.129 21.629,36.713 33.617,24.725 v1(34.65,24.725)
NetIC2_14: IC2.14 R24.2 | length 41.6
  Top Layer w0.254: IC2.14 24.903,47.287 26.037,47.287 v1(26.575,47.825) ; R24.2 37.377,24.652 38.031,24.652 38.379,25 v1(38.5,25)
  Bottom Layer w0.254: v1(26.575,47.825) 23.6,44.85 22.525,44.85 21.175,43.5 21.175,36.525 34.05,23.65 35.325,23.65 36.675,25 v1(38.5,25)
NetIC2_24: IC2.24 R22.1 | length 19
  Top Layer w0.254: v1(18.702,47.077) 18.741,47.038 18.741,46.975 19.235,46.481 20.066,46.481 IC2.24 ; v1(27.575,56.1) 28.575,56.1 R22.1
  Layer 2 w0.254: v1(18.702,47.077) 20.226,47.076 23.325,50.175 26.75,50.175 28.1,51.525 28.1,55.454 27.575,55.979 v1(27.575,56.1)
NetJ1_10: J1.10 R23.2 | length 24.1
  Top Layer w0.4: v1(24.775,51.275) 24.788,51.287 24.788,52.563 R23.2
  Bottom Layer w0.4: J1.10 12.675,65.515 12.675,61.45 20.95,53.175 22.875,53.175 v1(24.775,51.275)
NetJ1_11: J1.11 R25.2 | length 30
  Top Layer w0.4: v1(26.3,51.275) 26.325,51.3 26.325,52.55 R25.2
  Bottom Layer w0.4: J1.11 6.19,67.06 20.625,52.625 20.625,50.725 20.975,50.375 25.4,50.375 v1(26.3,51.275)
NetQ1_1: Q1.1 R37.1 R39.2
NetQ2_1: Q2.1 R38.1 R40.2
NetR1_1: R1.1 VD1.A | length 3.1
  Top Layer w0.4: VD1.A 34.575,53.825 36.091,53.825 36.325,54.059 R1.1
NetR5_1: R5.1 U1.94 | length 3.6
  Top Layer w0.254: R5.1 12.99,24.675 14,24.675 14.58,25.255 U1.94
NetR6_1: R6.1 U1.7 | length 11.2
  Top Layer w0.254: R6.1 11.475,18.4 12.525,18.4 13.25,19.125 20.525,19.125 20.962,19.562 20.962,20.562 U1.7
NetR7_1: R7.1 U1.8 | length 12.4
  Top Layer w0.254: R7.1 11.35,16.9 12.225,16.9 13.996,18.671 20.713,18.671 21.475,19.433 U1.8
NetR8_1: R8.1 XP2.2 | length 6.1
  Top Layer w0.254: XP2.2 6.765,25.16 7.618,24.307 7.618,21.532 8.25,20.9 R8.1
NetR8_2: R8.2 U1.1 | length 8.2
  Top Layer w0.254: R8.2 10.075,20.575 U1.1
NetR9_1: R9.1 U1.9 | length 14.1
  Top Layer w0.254: R9.1 11.475,15.175 12.125,15.175 12.65,15.7 12.65,16.35 14.517,18.217 20.901,18.217 21.975,19.291 U1.9
NetR28_2: R28.2 R29.1 | length 2.2
  Top Layer w0.4: R29.1 8.7,4.925 9.3,5.525 R28.2
NetR32_2: R32.2 R33.1 | length 2.8
  Top Layer w0.4: R32.2 39.45,5.8 39.6,5.65 39.6,4.975 40.8,3.775 R33.1
NetR39_1: R39.1 VT1.3
NetR40_1: R40.1 VT2.3
NetR41_2: R41.2 R43.2 VT1.1
NetR42_2: R42.2 R44.2 VT2.1
NetU1_6: U1.6 XP1.2 | length 29.5
  Top Layer w0.254: U1.6 v1(20.475,22.375)
  Layer 2 w0.254: v1(20.475,22.375) 20.475,22.345 21.87,20.95 30.425,20.95 33.425,23.95 33.425,34.876 33.574,35.025 XP1.2
NetU1_72: U1.72 X1.2 | length 21.5
  Top Layer w0.254: U1.72 19.475,37.904 19.825,38.254 v1(19.825,38.375)
  Layer 2 w0.254: X1.2 7.84,36.365 11.075,39.6 16.975,39.6 18.2,38.375 v1(19.825,38.375)
NetU1_76: U1.76 X1.4 | length 16.3
  Top Layer w0.254: v1(16.15,35.35) 16.15,34.268 16.163,34.255 U1.76
  Layer 2 w0.254: X1.4 8.135,31.285 11.2,34.35 15.15,34.35 v1(16.15,35.35)
P1_RX_N: IC2.22 J1.6 R14.1 | length 27.4
  Top Layer w0.25: J1.6 8.553,53.41 10.669,55.526 10.669,56.666 12.307,58.304 15.722,58.304 17.229,56.797 17.229,54.754 15.425,52.95 15.425,48.777 15.825,48.377 16.202,48.377 16.55,48.725 R14.1 16.75,48.725 17.098,48.377 19.584,48.377 IC2.22
P1_RX_P: IC2.23 J1.3 R15.1 | length 23.4
  Top Layer w0.25: J1.3 12.032,56.103 11.319,56.103 11.173,56.25 11.173,56.457 12.516,57.8 15.514,57.8 16.725,56.589 16.725,54.963 16.594,54.831 14.921,53.159 14.921,48.568 15.616,47.873 16.202,47.873 16.55,47.525 R15.1 16.75,47.525 17.098,47.873 19.375,47.873 20.559,46.689 IC2.23
P1_TX_N: IC2.20 J1.2 R16.1 | length 15.2
  Top Layer w0.25: v1(18.807,52.882) 18.893,52.796 18.893,52.53 18.918,52.505 18.918,52.468 19.669,51.717 20.502,50.884 20.502,50.298 20.85,49.95 R16.1 20.85,49.75 20.502,49.402 20.502,48.873 IC2.20
  Layer 2 w0.25: J1.2 13.302,53.257 12.589,53.257 12.443,53.11 12.443,52.903 13.01,52.336 14.723,52.336 15.754,53.367 17.971,53.367 18.37,52.968 18.721,52.968 v1(18.807,52.882)
P1_TX_P: IC2.21 J1.1 R17.1 | length 18.6
  Top Layer w0.25: v1(18.1,52.175) 18.186,52.089 18.452,52.089 18.471,52.07 18.603,52.07 19.998,50.675 19.998,50.298 19.65,49.95 R17.1 19.65,49.75 19.998,49.402 19.998,48.664 21.266,47.396 IC2.21
  Layer 2 w0.25: J1.1 13.209,54.434 13.031,54.434 11.939,53.342 11.939,52.694 12.801,51.832 14.932,51.832 15.963,52.863 17.763,52.863 18.014,52.612 18.014,52.261 v1(18.1,52.175)
PWR1: R42.1 U1.71
PWR2: R41.1 U1.70
RESET: C30.2 R11.2 U1.14 X1.1 | length 39.2
  Top Layer w0.254: X1.1 2.85,38.98 4.76,38.98 5.29,38.45 R11.2 C30.2 ; U1.14 24.487,20.587 24.487,22.287 v1(24.5,22.3)
  Bottom Layer w0.254: X1.1 2.85,38.98 15.245,38.98 24.5,29.725 v1(24.5,22.3)
RMII_CRS_DV: R21.1 U1.32 | length 5.9
  Top Layer w0.254: U1.32 33.82,25.255 33.973,25.102 33.973,23.802 34.9,22.875 R21.1
RMII_MDC: IC2.13 U1.16 | length 32.7
  Top Layer w0.254: IC2.13 24.803,46.481 26.285,46.481 26.479,46.675 v1(26.6,46.675) ; U1.16 25.475,23.204 26.004,23.733 v1(26.004,23.854)
  Layer 2 w0.254: v1(26.004,23.854) 26.004,27.054 31.475,32.525 31.475,41.8 v1(26.6,46.675)
RMII_MDIO: IC2.12 U1.25 | length 60.5
  Top Layer w0.254: IC2.12 24.803,45.279 26.133,45.279 26.504,45.65 v1(26.625,45.65) ; v1(29.35,23) 29.435,22.915 29.435,22.407 29.975,21.867 U1.25
  Layer 2 w0.254: v1(26.625,45.65) 30.65,41.625 30.65,33.125 24.375,26.85 24.375,24.2 25.06,23.515 26.102,22.473 28.823,22.473 v1(29.35,23)
  Layer 3 w0.254: v1(26.625,45.65) 26.625,42.15 26.375,41.9 26.375,32.5 29.35,29.525 v1(29.35,23)
RMII_REF_CLK: R24.1 U1.24 | length 17.3
  Top Layer w0.254: v1(28.175,23.9) 28.175,23.025 29.475,21.725 U1.24 ; R24.1 37.3,22.875 38.375,21.8 v1(38.4,21.8)
  Bottom Layer w0.254: v1(28.175,23.9) 29.075,24.8 30.925,24.8 33.925,21.8 v1(38.4,21.8)
RMII_RXD0: R18.1 U1.33 | length 4.3
  Top Layer w0.254: U1.33 35.355,25.755 35.7,26.1 R18.1
RMII_RXD1: R19.1 U1.34 | length 6.5
  Top Layer w0.254: U1.34 33.83,26.255 34.475,26.9 37.05,26.9 37.2,26.75 R19.1
RMII_TX_EN: IC2.16 U1.48 | length 21.9
  Top Layer w0.254: IC2.16 24.416,48.215 24.765,48.215 v1(25.525,48.975) ; v1(29.7,33.475) 29.821,33.475 30.041,33.255 U1.48
  Layer 2 w0.254: v1(25.525,48.975) 25.525,45.625 29.7,41.45 v1(29.7,33.475)
RMII_TXD0: IC2.17 U1.51 | length 17.3
  Top Layer w0.254: IC2.17 23.244,47.76 24.5,49.015 v1(24.5,49.025) ; v1(27.875,39) 27.914,39 29.089,37.825 29.275,37.825 29.975,37.125 U1.51
  Layer 2 w0.254: v1(24.5,49.025) 24.5,44.15 25.975,42.675 25.975,40.9 v1(27.875,39)
RMII_TXD1: IC2.18 U1.52 | length 21
  Top Layer w0.254: IC2.18 23.36,48.573 23.36,48.96 v1(23.45,49.05) ; v1(27.875,37.6) 28.672,37.6 29.462,36.81 29.462,35.948 U1.52
  Layer 2 w0.254: v1(23.45,49.05) 20.75,46.35 20.75,42.075 25.225,37.6 v1(27.875,37.6)
TRIG1: R28.1 R30.2 U1.64 | length 35.7
  Top Layer w0.254: v1(18.975,28.3) 23.475,32.8 U1.64
  Top Layer w0.4: R28.1 R30.2 10.975,11.119 11.075,11.219 v1(11.075,11.3)
  Layer 2 w0.4: v1(11.075,11.3) 13.304,13.529 13.604,13.529 15.775,15.7 15.775,25.1 v1(18.975,28.3)
TRIG2: R32.1 R34.2 U1.60 | length 49.8
  Top Layer w0.254: v1(20.45,24.45) 25.475,29.475 U1.60
  Top Layer w0.4: R32.1 39.362,7.412 40.912,7.412 R34.2 40.925,8.744 40.75,8.919 v1(40.75,9)
  Layer 2 w0.4: v1(20.45,24.45) 19.325,23.325 19.325,21.5 20.95,19.875 34.9,19.875 40.75,14.025 v1(40.75,9)
V_24pwr: C1.1 DD1.1 DG1.1 R1.2 | length 23.9
  Top Layer w0.4: R1.2 36.425,56.675 37.762,58.013 38.213,58.013
  Top Layer w1: DG1.1 27.1,60.55 C1.1 35.675,60.55 38.213,58.013 39.075,57.15 39.075,55.311 40.55,55.311 40.575,55.286 DD1.1
pads on no net: 1.4 2.4 J1. J1.7 U1.2 U1.3 U1.4 U1.5 U1.15 U1.17 U1.18 U1.30 U1.31 U1.35 U1.36 U1.37 U1.38 U1.39 U1.40 U1.41 U1.42 U1.43 U1.44 U1.45 U1.46 U1.47 U1.53 U1.54 U1.55 U1.56 U1.57 U1.58 U1.61 U1.62 U1.65 U1.66 U1.67 U1.68 U1.69 U1.83 U1.84 U1.85 U1.86 U1.87 U1.88 U1.89 U1.90 U1.91 U1.92 U1.93 U1.95 U1.96 U1.97 U1.98

## Polygon pours and split planes (outlines as drawn)
GND on Layer 3 "NONET_L-01_P-001" (solid, remove dead copper, pour order 1): 0,69.3 52.5,69.3 52.5,0 0,0
GND on Layer 2 "NONET_L-01_P-001" (solid, remove dead copper, pour order 2): 0,69.3 52.5,69.3 52.5,0 0,0
GND on Top Layer "NONET_L-01_P-001" (solid, remove dead copper, pour order 3): 0,69.3 52.5,69.3 52.5,0 0,0
GND on Bottom Layer "NONET_L-01_P-001" (solid, remove dead copper, pour order 0): 0,69.3 52.5,69.3 52.5,0 0,0

## Keep-outs
Keep-Out Layer:
  the board outline again, w0.3

## Silkscreen, mask and mechanical layers (free items; w line width, h text height)
Top Overlay:
  lines w0.3: 2.875,22.475 2.875,14.925 4.65,14.925 7.6,11.975 13.025,11.975
  text "-" at 21.575,68.75 h0.8 r180
  text "+" at 26.433,68 h0.8 r90
  text "R" at 1.8,41.15 h0.8
  text "RSet" at 2.85,26.025 h0.8 r270
  text "+" at 5.142,20.7 h0.8 r270
  text "+5-TG-EC-G" at 2.071,13.679 h1 r90
  text "ADC1" at 12.175,1.225 h0.8 r90
  text "ADC2" at 38.15,0.95 h0.8 r90
  text "TRIG1" at 7.45,0.9 h0.8 r90
  text "TRIG2" at 42.825,0.625 h0.8 r90